# Altium PCB StrainLogger.PcbDoc (part 1 of 2)
Units mm, origin at the board's own origin, x right, y up, seen from the top; angles counter-clockwise.
Board outline 45 x 79 mm, 2 copper layers (Top Layer, Bottom Layer), stack 1.58 mm thick; 171 components, 91 nets, 490 pads, 131 vias.
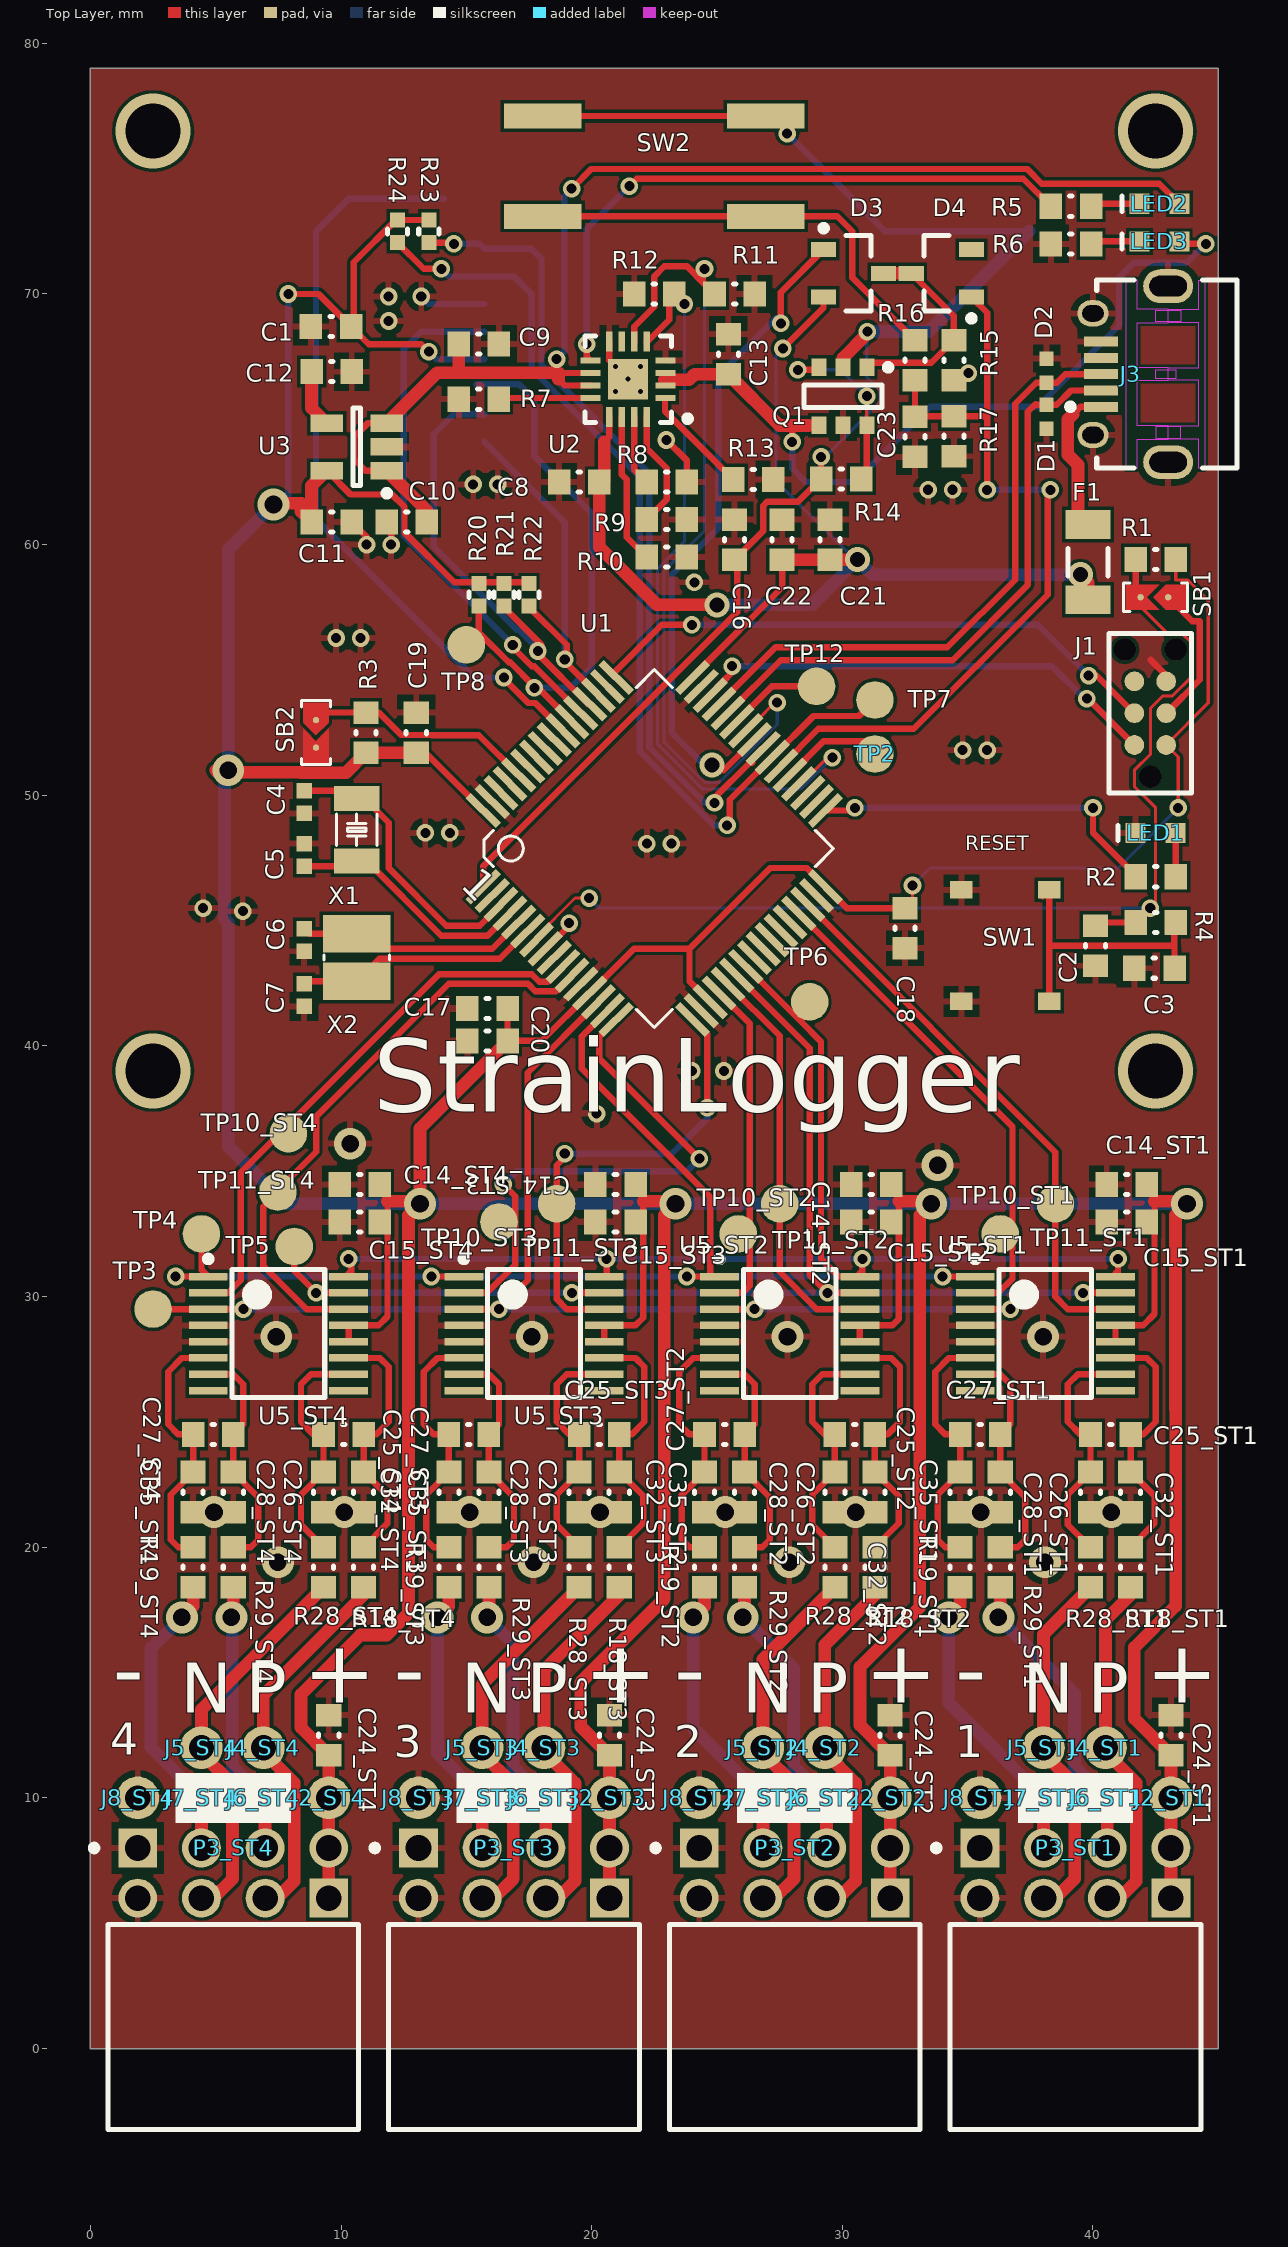
[diagram p0: Top Layer view]
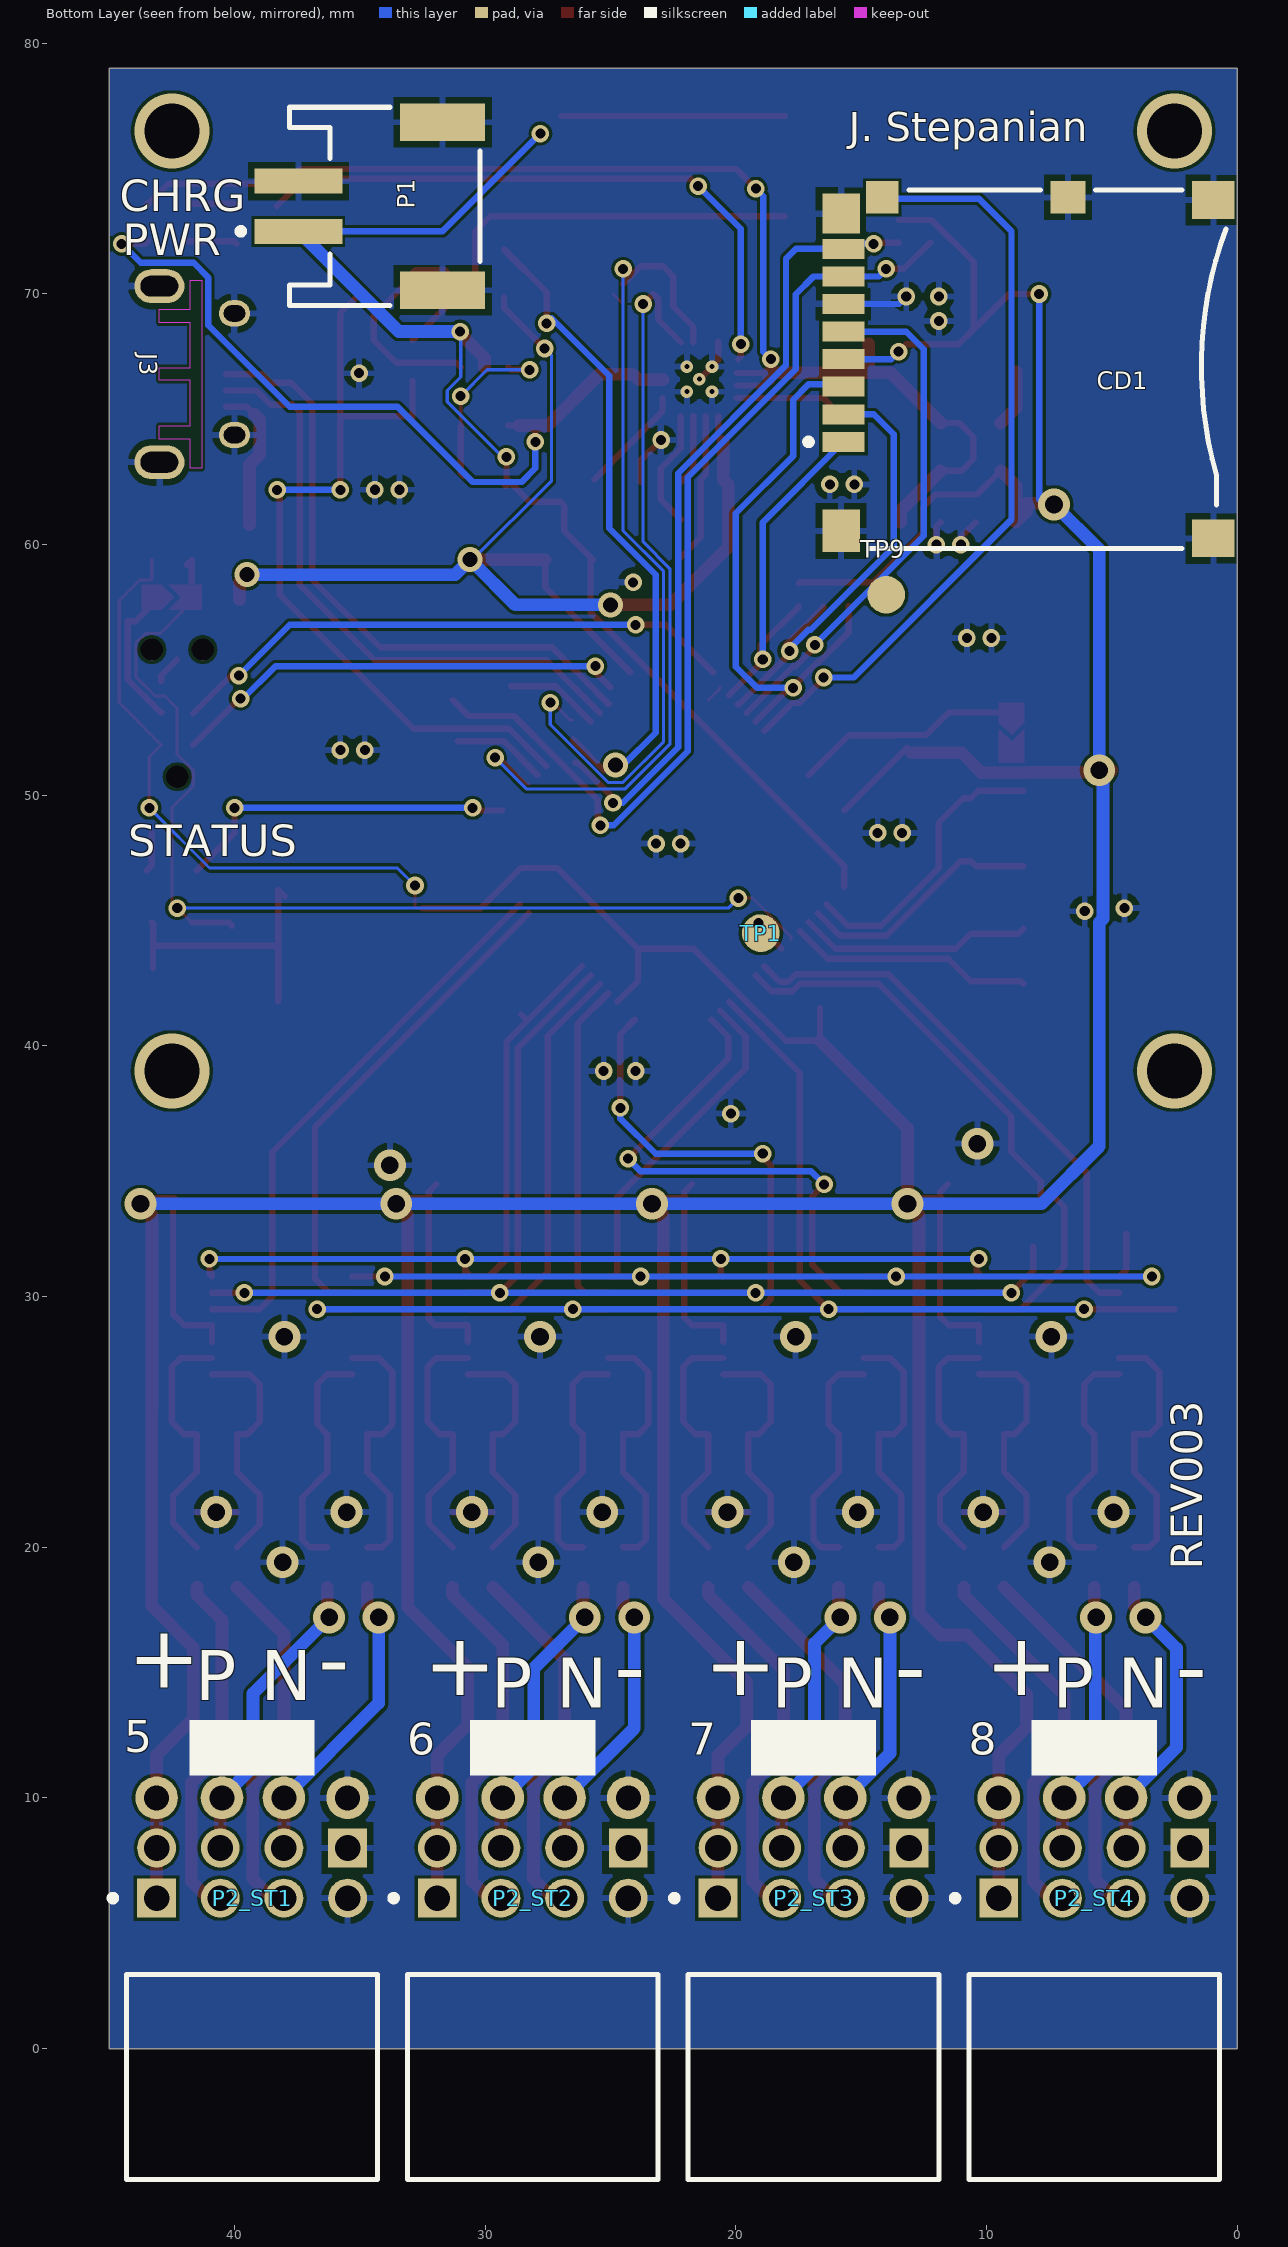
[diagram p1: Bottom Layer view, seen from below]
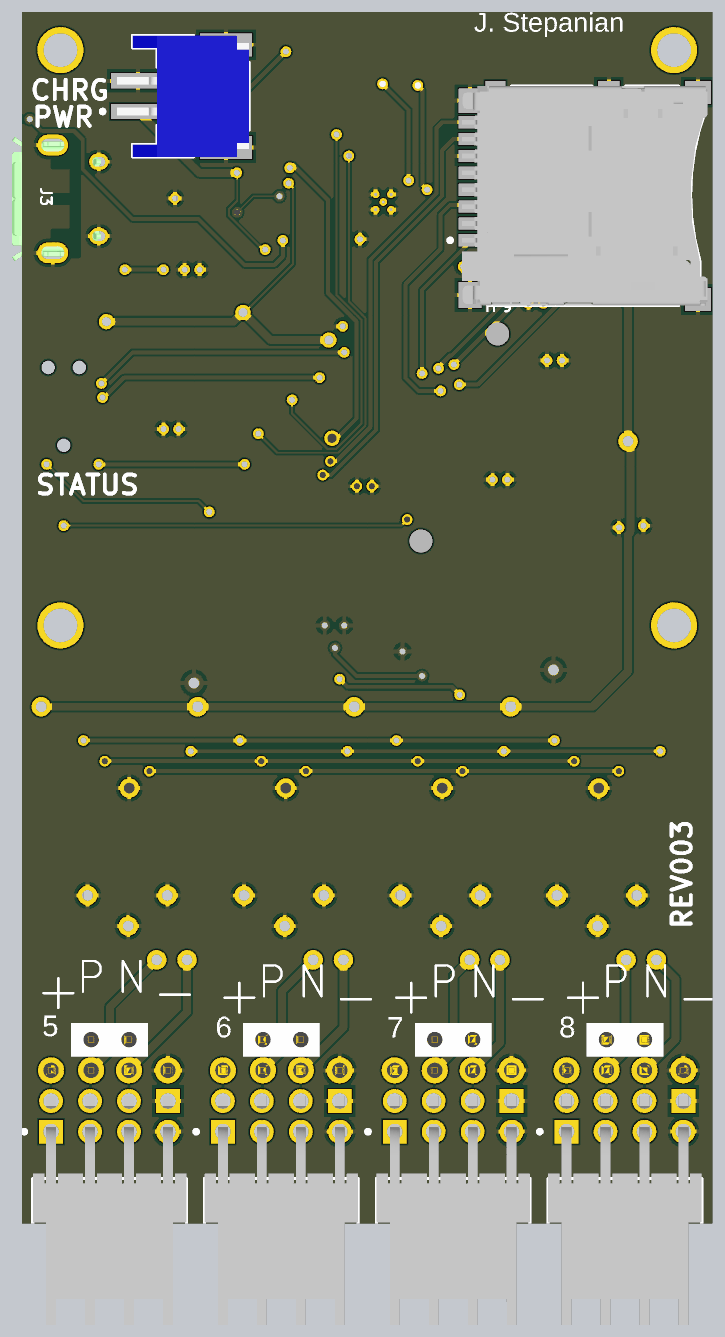
[diagram p3: 3D render of the assembled board from below, using the file's embedded part models]

## Layer stack, top to bottom
Top Solder: solder mask 0.0102, Solder Resist, Dk 3.5
Top Layer: signal copper 0.0356
Dielectric 1: dielectric 1.5089, FR-4, Dk 4.8
Bottom Layer: signal copper 0.0356
Bottom Solder: solder mask 0.0102, Solder Resist, Dk 3.5

## Board outline
0,0 45,0 45,79 0,79

## Design rules (kind name [scope] priority, off if disabled: settings)
Clearance [All] p1: gap=0.127 ignorepadtopadclearanceinfootprint=FALSE
DiffPairsRouting [All] p1: maxlimit=0.254 minlimit=0.254 mostfreqgap=0.254 toplayer_minwidth=0.254 toplayer_maxwidth=0.381 toplayer_prefwidth=0.381 bottomlayer_minwidth=0.254 bottomlayer_maxwidth=0.381 bottomlayer_prefwidth=0.381 maxuncoupledlength=12.7
HoleSize [All] p1: absolutevalues=TRUE maxlimit=6.3 minlimit=0.2 maxpercent=80.000 minpercent=20.000
MinimumAnnularRing [All] p1: minimumring=0.102
MinimumSolderMaskSliver [All] p1: minsoldermaskwidth=0.102
PlaneClearance [All] p1: clearance=0.254
PolygonConnect [All] p1: connectstyle=Relief reliefconductorwidth=0.254 reliefentries=4 polygonreliefangle="90 Angle" airgapwidth=0.254
RoomDefinition ST4 [InComponentClass('ST4')] p1: confinementstyle=ConfineIn formatcopy=TRUE lockcomponents=FALSE outline 12.3,28 2.1,28 2.1,0 12.3,0
RoomDefinition ST3 [InComponentClass('ST3')] p2: confinementstyle=ConfineIn formatcopy=TRUE lockcomponents=FALSE outline 22.5,28 12.3,28 12.3,0 22.5,0
RoomDefinition ST2 [InComponentClass('ST2')] p3: confinementstyle=ConfineIn formatcopy=TRUE lockcomponents=FALSE outline 32.7,28 22.5,28 22.5,0 32.7,0
RoomDefinition ST1 [InComponentClass('ST1')] p4: confinementstyle=ConfineIn formatcopy=TRUE lockcomponents=FALSE outline 42.9,28 32.7,28 32.7,0 42.9,0
RoutingVias [All] p1: holewidth=0.6 width=1 viastyle="Through Hole" minholewidth=0.4 minwidth=0.7 maxholewidth=0.7 maxwidth=1.27
SolderMaskExpansion [All] p1: expansion=0.076
Width [All] p1: maxlimit=0.508 minlimit=0.127 preferedwidth=0.254
26 further rules are at their usual default settings.

## Classes and differential pairs
net class X2_Nets: HFXO_1_2 HFXO_2_2
net class X1_Nets: LFXO_1_2 LFXO_2_2
net class U5_ST4_Nets: ADC_CLK_2 AIN0_ST4 AIN1_ST4 AIN2_ST4 AIN3_ST4 BR_VDD_ST1 DRDY#4 GND NetU5_ST4_8 NetU5_ST4_9 SPI1_MISO_2 SPI1_MOSI_2 SPI1_SCK_2 ST_CS#4
net class U5_ST3_Nets: ADC_CLK_2 AIN0_ST3 AIN1_ST3 AIN2_ST3 AIN3_ST3 BR_VDD_ST1 DRDY#3 GND NetU5_ST3_8 NetU5_ST3_9 SPI1_MISO_2 SPI1_MOSI_2 SPI1_SCK_2 ST_CS#3
net class U5_ST2_Nets: ADC_CLK_2 AIN0_ST2 AIN1_ST2 AIN2_ST2 AIN3_ST2 BR_VDD_ST1 DRDY#2 GND NetU5_ST2_8 NetU5_ST2_9 SPI1_MISO_2 SPI1_MOSI_2 SPI1_SCK_2 ST_CS#2
net class U5_ST1_Nets: ADC_CLK_2 AIN0_ST1 AIN1_ST1 AIN2_ST1 AIN3_ST1 BR_VDD_ST1 DRDY#1 GND NetU5_ST1_8 NetU5_ST1_9 SPI1_MISO_2 SPI1_MOSI_2 SPI1_SCK_2 ST_CS#1
net class U3_Nets: BR_VDD_ST1 GND NetC9_2 NetC12_2
net class U2_Nets: GND NetC9_2 NetR5_1 NetR7_2 NetR8_2 NetR9_2 NetR10_1 NetR13_2 NetU2_7 PWR_CTL_1 PWR_CTL_2 VBAT_SW VBUS
net class U1_Nets: #RST_2 ADC_CLK_2 BOOT0_2 BR_VDD_ST1 BUTTON DRDY#1 DRDY#2 DRDY#3 DRDY#4 DRDY_TIM_2 GND HFXO_1_2 HFXO_2_2 LED_STAT_2 LFXO_1_2 LFXO_2_2 NetU1_2 NetU1_9 NetU1_24 NetU1_25 NetU1_26 NetU1_27 NetU1_28 NetU1_34 NetU1_35 NetU1_50 NetU1_56 NetU1_57 NetU1_58 NetU1_59 NetU1_61 NetU1_62 PC0_2 PWR_CTL_1 PWR_CTL_2 SD_CLK_2 SD_CMD_2 SD_DAT0_2 SD_DAT1_2 SD_DAT2_2 SD_DAT3_2 SD_DETECT_2 SPI1_MISO_2 SPI1_MOSI_2 SPI1_SCK_2 ST_CS#1 ST_CS#2 ST_CS#3 ST_CS#4 SWCLK_2 SWDIO_2 SYNC_2 USB_1_N USB_1_P V_LATCH VBAT VBUS
net class TP12_Nets: DRDY_TIM_2
net class TP11_ST4_Nets: DRDY#4
net class TP11_ST3_Nets: DRDY#3
net class TP11_ST2_Nets: DRDY#2
net class TP11_ST1_Nets: DRDY#1
net class TP10_ST4_Nets: ST_CS#4
net class TP10_ST3_Nets: ST_CS#3
net class TP10_ST2_Nets: ST_CS#2
net class TP10_ST1_Nets: ST_CS#1
net class TP9_Nets: SD_CLK_2
net class TP8_Nets: SD_CMD_2
net class TP7_Nets: SD_DAT0_2
net class TP6_Nets: SPI1_MOSI_2
net class TP5_Nets: SPI1_MISO_2
net class TP4_Nets: SPI1_SCK_2
net class TP3_Nets: ADC_CLK_2
net class TP2_Nets: SYNC_2
net class TP1_Nets: PC0_2
net class SW2_Nets: NetR16_1 VBAT
net class SW1_Nets: #RST_FL_2 GND
net class ST_CS#[1..4]: ST_CS#1 ST_CS#2 ST_CS#3 ST_CS#4
net class SB2_Nets: BOOT0_2 GND
net class SB1_Nets: #RST_2 NetJ1_3
net class R29_ST4_Nets: AIN2_ST4 BRIDGE2_ST4_P
net class R29_ST3_Nets: AIN2_ST3 BRIDGE2_ST3_P
net class R29_ST2_Nets: AIN2_ST2 BRIDGE2_ST2_P
net class R29_ST1_Nets: AIN2_ST1 BRIDGE2_ST1_P
net class R28_ST4_Nets: AIN1_ST4 BRIDGE1_ST4_N
net class R28_ST3_Nets: AIN1_ST3 BRIDGE1_ST3_N
net class R28_ST2_Nets: AIN1_ST2 BRIDGE1_ST2_N
net class R28_ST1_Nets: AIN1_ST1 BRIDGE1_ST1_N
net class R24_Nets: BR_VDD_ST1 SD_DAT0_2
net class R23_Nets: BR_VDD_ST1 SD_DAT1_2
net class R22_Nets: BR_VDD_ST1 SD_DAT2_2
net class R21_Nets: BR_VDD_ST1 SD_DAT3_2
net class R20_Nets: BR_VDD_ST1 SD_CMD_2
net class R19_ST4_Nets: AIN3_ST4 BRIDGE2_ST4_N
net class R19_ST3_Nets: AIN3_ST3 BRIDGE2_ST3_N
net class R19_ST2_Nets: AIN3_ST2 BRIDGE2_ST2_N
net class R19_ST1_Nets: AIN3_ST1 BRIDGE2_ST1_N
net class R18_ST4_Nets: AIN0_ST4 BRIDGE1_ST4_P
net class R18_ST3_Nets: AIN0_ST3 BRIDGE1_ST3_P
net class R18_ST2_Nets: AIN0_ST2 BRIDGE1_ST2_P
net class R18_ST1_Nets: AIN0_ST1 BRIDGE1_ST1_P
net class R17_Nets: BUTTON GND
net class R16_Nets: BUTTON NetR16_1
net class R15_Nets: GND NetD3_3
net class R14_Nets: NetQ1_3 VBAT
net class R13_Nets: GND NetR13_2
net class R12_Nets: GND PWR_CTL_2
net class R11_Nets: GND PWR_CTL_1
net class R10_Nets: GND NetR10_1
net class R9_Nets: GND NetR9_2
net class R8_Nets: GND NetR8_2
net class R7_Nets: GND NetR7_2
net class R6_Nets: GND NetLED3_1
net class R5_Nets: NetLED2_1 NetR5_1
net class R4_Nets: #RST_2 #RST_FL_2
net class R3_Nets: BOOT0_2 BR_VDD_ST1
net class R2_Nets: LED_STAT_2 NetLED1_2
net class R1_Nets: #RST_2 BR_VDD_ST1
net class Q1_Nets: GND NetD3_3 NetQ1_3 VBAT VBAT_SW
net class P3_ST4_Nets: BR_VDD_ST1 BRIDGE2_ST4_N BRIDGE2_ST4_P GND
net class P3_ST3_Nets: BR_VDD_ST1 BRIDGE2_ST3_N BRIDGE2_ST3_P GND
net class P3_ST2_Nets: BR_VDD_ST1 BRIDGE2_ST2_N BRIDGE2_ST2_P GND
net class P3_ST1_Nets: BR_VDD_ST1 BRIDGE2_ST1_N BRIDGE2_ST1_P GND
net class P2_ST4_Nets: BR_VDD_ST1 BRIDGE1_ST4_N BRIDGE1_ST4_P GND
net class P2_ST3_Nets: BR_VDD_ST1 BRIDGE1_ST3_N BRIDGE1_ST3_P GND
net class P2_ST2_Nets: BR_VDD_ST1 BRIDGE1_ST2_N BRIDGE1_ST2_P GND
net class P2_ST1_Nets: BR_VDD_ST1 BRIDGE1_ST1_N BRIDGE1_ST1_P GND
net class P1_Nets: GND VBAT
net class LED3_Nets: NetLED3_1 VBAT_SW
net class LED2_Nets: NetC9_2 NetLED2_1
net class LED1_Nets: GND NetLED1_2
net class J8_ST4_Nets: GND
net class J8_ST3_Nets: GND
net class J8_ST2_Nets: GND
net class J8_ST1_Nets: GND
net class J7_ST4_Nets: BRIDGE2_ST4_N
net class J7_ST3_Nets: BRIDGE2_ST3_N
net class J7_ST2_Nets: BRIDGE2_ST2_N
net class J7_ST1_Nets: BRIDGE2_ST1_N
net class J6_ST4_Nets: BRIDGE2_ST4_P
net class J6_ST3_Nets: BRIDGE2_ST3_P
net class J6_ST2_Nets: BRIDGE2_ST2_P
net class J6_ST1_Nets: BRIDGE2_ST1_P
net class J5_ST4_Nets: BRIDGE1_ST4_N
net class J5_ST3_Nets: BRIDGE1_ST3_N
net class J5_ST2_Nets: BRIDGE1_ST2_N
net class J5_ST1_Nets: BRIDGE1_ST1_N
net class J4_ST4_Nets: BRIDGE1_ST4_P
net class J4_ST3_Nets: BRIDGE1_ST3_P
net class J4_ST2_Nets: BRIDGE1_ST2_P
net class J4_ST1_Nets: BRIDGE1_ST1_P
net class J3_Nets: GND NetF1_1 NetJ3_4 USB_1_N USB_1_P
net class J2_ST4_Nets: BR_VDD_ST1
net class J2_ST3_Nets: BR_VDD_ST1
net class J2_ST2_Nets: BR_VDD_ST1
net class J2_ST1_Nets: BR_VDD_ST1
net class J1_Nets: BR_VDD_ST1 GND NetJ1_3 NetJ1_6 SWCLK_2 SWDIO_2
net class F1_Nets: NetF1_1 VBUS
net class DRDY#[1..4]: DRDY#1 DRDY#2 DRDY#3 DRDY#4
net class D4_Nets: BUTTON NetD3_3 NetD4_2
net class D3_Nets: NetD3_3 V_LATCH VBUS
net class D2_Nets: GND USB_1_P
net class D1_Nets: GND USB_1_N
net class CD1_Nets: BR_VDD_ST1 GND SD_CLK_2 SD_CMD_2 SD_DAT0_2 SD_DAT1_2 SD_DAT2_2 SD_DAT3_2 SD_DETECT_2
net class C35_ST4_Nets: AIN3_ST4 GND
net class C35_ST3_Nets: AIN3_ST3 GND
net class C35_ST2_Nets: AIN3_ST2 GND
net class C35_ST1_Nets: AIN3_ST1 GND
net class C32_ST4_Nets: AIN0_ST4 GND
net class C32_ST3_Nets: AIN0_ST3 GND
net class C32_ST2_Nets: AIN0_ST2 GND
net class C32_ST1_Nets: AIN0_ST1 GND
net class C28_ST4_Nets: AIN2_ST4 GND
net class C28_ST3_Nets: AIN2_ST3 GND
net class C28_ST2_Nets: AIN2_ST2 GND
net class C28_ST1_Nets: AIN2_ST1 GND
net class C27_ST4_Nets: AIN2_ST4 AIN3_ST4
net class C27_ST3_Nets: AIN2_ST3 AIN3_ST3
net class C27_ST2_Nets: AIN2_ST2 AIN3_ST2
net class C27_ST1_Nets: AIN2_ST1 AIN3_ST1
net class C26_ST4_Nets: AIN1_ST4 GND
net class C26_ST3_Nets: AIN1_ST3 GND
net class C26_ST2_Nets: AIN1_ST2 GND
net class C26_ST1_Nets: AIN1_ST1 GND
net class C25_ST4_Nets: AIN0_ST4 AIN1_ST4
net class C25_ST3_Nets: AIN0_ST3 AIN1_ST3
net class C25_ST2_Nets: AIN0_ST2 AIN1_ST2
net class C25_ST1_Nets: AIN0_ST1 AIN1_ST1
net class C24_ST4_Nets: BR_VDD_ST1 GND
net class C24_ST3_Nets: BR_VDD_ST1 GND
net class C24_ST2_Nets: BR_VDD_ST1 GND
net class C24_ST1_Nets: BR_VDD_ST1 GND
net class C23_Nets: BUTTON GND
net class C22_Nets: GND VBUS
net class C21_Nets: GND VBUS
net class C20_Nets: BR_VDD_ST1 GND
net class C19_Nets: BR_VDD_ST1 GND
net class C18_Nets: BR_VDD_ST1 GND
net class C17_Nets: BR_VDD_ST1 GND
net class C16_Nets: GND VBAT
net class C15_ST4_Nets: BR_VDD_ST1 GND
net class C15_ST3_Nets: BR_VDD_ST1 GND
net class C15_ST2_Nets: BR_VDD_ST1 GND
net class C15_ST1_Nets: BR_VDD_ST1 GND
net class C14_ST4_Nets: BR_VDD_ST1 GND
net class C14_ST3_Nets: BR_VDD_ST1 GND
net class C14_ST2_Nets: BR_VDD_ST1 GND
net class C14_ST1_Nets: BR_VDD_ST1 GND
net class C13_Nets: GND VBAT_SW
net class C12_Nets: GND NetC12_2
net class C11_Nets: BR_VDD_ST1 GND
net class C10_Nets: GND NetC9_2
net class C9_Nets: GND NetC9_2
net class C8_Nets: GND VBUS
net class C7_Nets: GND HFXO_2_2
net class C6_Nets: GND HFXO_1_2
net class C5_Nets: GND LFXO_2_2
net class C4_Nets: GND LFXO_1_2
net class C3_Nets: #RST_FL_2 GND
net class C2_Nets: #RST_2 GND
net class C1_Nets: BR_VDD_ST1 GND
component class MCU: C1 C2 C3 C4 C5 C6 C7 CD1 J1 LED1 R1 R2 R3 R4 R20 R21 R22 R23 R24 SB1 SB2 SW1 TP1 TP2 TP3 TP4 TP5 TP6 TP7 TP8 TP9 TP12 U1 X1 X2
component class ST4: C14_ST4 C15_ST4 C24_ST4 C25_ST4 C26_ST4 C27_ST4 C28_ST4 C32_ST4 C35_ST4 J2_ST4 J4_ST4 J5_ST4 J6_ST4 J7_ST4 J8_ST4 P2_ST4 P3_ST4 R18_ST4 R19_ST4 R28_ST4 R29_ST4 TP10_ST4 TP11_ST4 U5_ST4
component class ST3: C14_ST3 C15_ST3 C24_ST3 C25_ST3 C26_ST3 C27_ST3 C28_ST3 C32_ST3 C35_ST3 J2_ST3 J4_ST3 J5_ST3 J6_ST3 J7_ST3 J8_ST3 P2_ST3 P3_ST3 R18_ST3 R19_ST3 R28_ST3 R29_ST3 TP10_ST3 TP11_ST3 U5_ST3
component class ST2: C14_ST2 C15_ST2 C24_ST2 C25_ST2 C26_ST2 C27_ST2 C28_ST2 C32_ST2 C35_ST2 J2_ST2 J4_ST2 J5_ST2 J6_ST2 J7_ST2 J8_ST2 P2_ST2 P3_ST2 R18_ST2 R19_ST2 R28_ST2 R29_ST2 TP10_ST2 TP11_ST2 U5_ST2
component class ST1: C14_ST1 C15_ST1 C24_ST1 C25_ST1 C26_ST1 C27_ST1 C28_ST1 C32_ST1 C35_ST1 J2_ST1 J4_ST1 J5_ST1 J6_ST1 J7_ST1 J8_ST1 P2_ST1 P3_ST1 R18_ST1 R19_ST1 R28_ST1 R29_ST1 TP10_ST1 TP11_ST1 U5_ST1
component class PWR: C8 C9 C10 C11 C12 C13 C16 C17 C18 C19 C20 C21 C22 C23 D1 D2 D3 D4 F1 J3 LED2 LED3 P1 Q1 R5 R6 R7 R8 R9 R10 R11 R12 R13 R14 R15 R16 R17 SW2 U2 U3
channel class Strain-TI: ST1 ST2 ST3 ST4 ST5 ST6 ST7
differential pair USB_1: +USB_1_P -USB_1_N

## Components (designator, comment, footprint, x,y, rotation, side; value= is the part's Value field where it differs from the comment)
C1 "100n" CAP_0603_M 9.6,68.7 r0 top
C2 "22n" CAP_0603_M 40.1,44 r90 top
C3 "10p" CAP_0603_M 42.454,43.1 r0 top
C4 "Capacitor" CAP_0402_M 8.525,49.725 r270 top value=6.8pF
C5 "Capacitor" CAP_0402_M 8.525,47.625 r90 top value=6.8pF
C6 "Capacitor" CAP_0402_M 8.525,44.225 r90 top value=8.2pF
C7 "Capacitor" CAP_0402_M 8.525,42.025 r90 top value=8.2pF
C8 "1u" CAP_0603_M 19.5,62.5 r0 top locked
C9 "4.7u" CAP_0603_M 15.5,68 r180 top
C10 "1u" CAP_0603_M 12.625,60.9 r0 top locked
C11 "4.7u" CAP_0603_M 9.625,60.9 r180 top locked
C12 "10n" CAP_0603_M 9.625,66.9 r180 top locked
C13 "4.7u" CAP_0603_M 25.45,67.6 r270 top locked
C14_ST1 "1u" CAP_0603_M 41.35,34.475 r0 top locked (schematic designator C14)
C14_ST2 "1u" CAP_0603_M 31.15,34.475 r0 top locked (schematic designator C14)
C14_ST3 "1u" CAP_0603_M 20.95,34.475 r0 top locked (schematic designator C14)
C14_ST4 "1u" CAP_0603_M 10.75,34.475 r0 top locked (schematic designator C14)
C15_ST1 "1u" CAP_0603_M 41.35,32.975 r0 top locked (schematic designator C15)
C15_ST2 "1u" CAP_0603_M 31.15,32.975 r0 top locked (schematic designator C15)
C15_ST3 "1u" CAP_0603_M 20.95,32.975 r0 top locked (schematic designator C15)
C15_ST4 "1u" CAP_0603_M 10.75,32.975 r0 top locked (schematic designator C15)
C16 "1u" CAP_0603_M 25.7,60.2 r270 top
C17 "4.7u" CAP_0603_M 15.843,41.5 r0 top
C18 "100n" CAP_0603_M 32.5,44.7 r90 top
C19 "100n" CAP_0603_M 13,52.5 r270 top
C20 "100n" CAP_0603_M 15.843,40.2 r0 top
C21 "1u" CAP_0603_M 29.5,60.2 r270 top
C22 "100n" CAP_0603_M 27.6,60.2 r270 top
C23 "220n" CAP_0603_M 32.9,64.3 r90 top
C24_ST1 "1u" CAP_0603_M 43.11,12.5 r90 top (schematic designator C24)
C24_ST2 "1u" CAP_0603_M 31.91,12.5 r90 top (schematic designator C24)
C24_ST3 "1u" CAP_0603_M 20.71,12.5 r90 top (schematic designator C24)
C24_ST4 "1u" CAP_0603_M 9.51,12.5 r90 top (schematic designator C24)
C25_ST1 "10n" CAP_0603_M 40.7,24.5 r0 top (schematic designator C25)
C25_ST2 "10n" CAP_0603_M 30.5,24.5 r0 top (schematic designator C25)
C25_ST3 "10n" CAP_0603_M 20.3,24.5 r0 top (schematic designator C25)
C25_ST4 "10n" CAP_0603_M 10.1,24.5 r0 top (schematic designator C25)
C26_ST1 "10n" CAP_0603_M 39.9,22.2 r270 top (schematic designator C26)
C26_ST2 "10n" CAP_0603_M 29.7,22.2 r270 top (schematic designator C26)
C26_ST3 "10n" CAP_0603_M 19.5,22.2 r270 top (schematic designator C26)
C26_ST4 "10n" CAP_0603_M 9.3,22.2 r270 top (schematic designator C26)
C27_ST1 "10n" CAP_0603_M 35.5,24.5 r0 top (schematic designator C27)
C27_ST2 "10n" CAP_0603_M 25.3,24.5 r0 top (schematic designator C27)
C27_ST3 "10n" CAP_0603_M 15.1,24.5 r0 top (schematic designator C27)
C27_ST4 "10n" CAP_0603_M 4.9,24.5 r0 top (schematic designator C27)
C28_ST1 "10n" CAP_0603_M 36.3,22.2 r270 top (schematic designator C28)
C28_ST2 "10n" CAP_0603_M 26.1,22.2 r270 top (schematic designator C28)
C28_ST3 "10n" CAP_0603_M 15.9,22.2 r270 top (schematic designator C28)
C28_ST4 "10n" CAP_0603_M 5.7,22.2 r270 top (schematic designator C28)
C32_ST1 "10n" CAP_0603_M 41.5,22.2 r270 top (schematic designator C32)
C32_ST2 "10n" CAP_0603_M 31.3,22.2 r270 top (schematic designator C32)
C32_ST3 "10n" CAP_0603_M 21.1,22.2 r270 top (schematic designator C32)
C32_ST4 "10n" CAP_0603_M 10.9,22.2 r270 top (schematic designator C32)
C35_ST1 "10n" CAP_0603_M 34.7,22.2 r90 top (schematic designator C35)
C35_ST2 "10n" CAP_0603_M 24.5,22.2 r90 top (schematic designator C35)
C35_ST3 "10n" CAP_0603_M 14.3,22.2 r90 top (schematic designator C35)
C35_ST4 "10n" CAP_0603_M 4.1,22.2 r90 top (schematic designator C35)
CD1 "CN-SD-8-2SW-4S_B" MOLX-502774-0891_V 8.325,67 r90 bottom locked
D1 "PGB1010402KR" LFUS-PGB1010402KR-2_V 38.15,65.105 r90 top
D2 "PGB1010402KR" LFUS-PGB1010402KR-2_V 38.15,66.945 r270 top
D3 "BAT54C" ONSC-BAT54CL_SOT-23 30.45,70.825 r0 top locked
D4 "BAT54C" ONSC-BAT54CL_SOT-23 33.95,70.825 r180 top locked
F1 "PTC 2A" PTC_1206_M 39.8,59.3 r270 top
J1 "J-Link" TC2030-MCP-NL_R2 42.285,50.735 r90 top
J2_ST1 "Pin Header" PIN_HEADER_1POS 43.11,10 r0 top (schematic designator J2)
J2_ST2 "Pin Header" PIN_HEADER_1POS 31.91,10 r0 top (schematic designator J2)
J2_ST3 "Pin Header" PIN_HEADER_1POS 20.71,10 r0 top (schematic designator J2)
J2_ST4 "Pin Header" PIN_HEADER_1POS 9.51,10 r0 top (schematic designator J2)
J3 "Micro USB" HIRO-ZX62D-B-5P8_V 41.5,66.8 r90 top locked
J4_ST1 "Pin Header" PIN_HEADER_1POS 40.5,12 r0 top (schematic designator J4)
J4_ST2 "Pin Header" PIN_HEADER_1POS 29.3,12 r0 top (schematic designator J4)
J4_ST3 "Pin Header" PIN_HEADER_1POS 18.1,12 r0 top (schematic designator J4)
J4_ST4 "Pin Header" PIN_HEADER_1POS 6.9,12 r0 top (schematic designator J4)
J5_ST1 "Pin Header" PIN_HEADER_1POS 38.03,12 r0 top (schematic designator J5)
J5_ST2 "Pin Header" PIN_HEADER_1POS 26.83,12 r0 top (schematic designator J5)
J5_ST3 "Pin Header" PIN_HEADER_1POS 15.63,12 r0 top (schematic designator J5)
J5_ST4 "Pin Header" PIN_HEADER_1POS 4.43,12 r0 top (schematic designator J5)
J6_ST1 "Pin Header" PIN_HEADER_1POS 40.5,10 r0 top (schematic designator J6)
J6_ST2 "Pin Header" PIN_HEADER_1POS 29.3,10 r0 top (schematic designator J6)
J6_ST3 "Pin Header" PIN_HEADER_1POS 18.1,10 r0 top (schematic designator J6)
J6_ST4 "Pin Header" PIN_HEADER_1POS 6.9,10 r0 top (schematic designator J6)
J7_ST1 "Pin Header" PIN_HEADER_1POS 38.03,10 r0 top (schematic designator J7)
J7_ST2 "Pin Header" PIN_HEADER_1POS 26.83,10 r0 top (schematic designator J7)
J7_ST3 "Pin Header" PIN_HEADER_1POS 15.63,10 r0 top (schematic designator J7)
J7_ST4 "Pin Header" PIN_HEADER_1POS 4.43,10 r0 top (schematic designator J7)
J8_ST1 "Pin Header" PIN_HEADER_1POS 35.49,10 r0 top (schematic designator J8)
J8_ST2 "Pin Header" PIN_HEADER_1POS 24.29,10 r0 top (schematic designator J8)
J8_ST3 "Pin Header" PIN_HEADER_1POS 13.09,10 r0 top (schematic designator J8)
J8_ST4 "Pin Header" PIN_HEADER_1POS 1.89,10 r0 top (schematic designator J8)
LED1 "BLUE" 0603_A 42.5,48.5 r0 top
LED2 "YLW" 0603_A 42.65,73.6 r0 top
LED3 "GRN" 0603_A 42.65,72.1 r0 top
P1 "S2B-PH-SM4-TB" "JST- S2B-PH-SM4-TB(LF)(SN)-2_V" 34,73.5 r90 bottom
P2_ST1 "KK100 RA" MOLEX_KK100_RA_4P 39.3,6 r180 bottom (schematic designator P2)
P2_ST2 "KK100 RA" MOLEX_KK100_RA_4P 28.1,6 r180 bottom (schematic designator P2)
P2_ST3 "KK100 RA" MOLEX_KK100_RA_4P 16.9,6 r180 bottom (schematic designator P2)
P2_ST4 "KK100 RA" MOLEX_KK100_RA_4P 5.7,6 r180 bottom (schematic designator P2)
P3_ST1 "KK100 RA" MOLEX_KK100_RA_4P 39.3,8 r0 top (schematic designator P3)
P3_ST2 "KK100 RA" MOLEX_KK100_RA_4P 28.1,8 r0 top (schematic designator P3)
P3_ST3 "KK100 RA" MOLEX_KK100_RA_4P 16.9,8 r0 top (schematic designator P3)
P3_ST4 "KK100 RA" MOLEX_KK100_RA_4P 5.7,8 r0 top (schematic designator P3)
Q1 "Si3552DV" VISHAY-TSOP6 30.025,65.915 r270 top
R1 "56K" RES_0603_M 42.5,59.4 r0 top
R2 "430R" RES_0603_M 42.5,46.75 r180 top
R3 "10k" RES_0603_M 11,52.5 r270 top
R4 "1k" RES_0603_M 42.5,44.925 r180 top
R5 "430R" RES_0603_M 39.122,73.5 r0 top
R6 "430R" RES_0603_M 39.122,72 r0 top
R7 "1.05K" RES_0603_M 15.5,65.8 r0 top
R8 "OPT" RES_0603_M 23,62.5 r180 top
R9 "620R" RES_0603_M 23,61 r180 top
R10 "4.3K" RES_0603_M 23,59.5 r0 top
R11 "100K" RES_0603_M 25.7,70 r180 top
R12 "100K" RES_0603_M 22.5,70 r180 top
R13 "10K" RES_0603_M 26.45,62.6 r180 top locked
R14 "100K" RES_0603_M 29.95,62.625 r180 top locked
R15 "100K" RES_0603_M 34.45,67.35 r90 top
R16 "18K" RES_0603_M 32.9,67.35 r270 top
R17 "100K" RES_0603_M 34.45,64.325 r90 top
R18_ST1 "100R" RES_0603_M 41.5,19.2 r90 top (schematic designator R18)
R18_ST2 "100R" RES_0603_M 31.3,19.2 r90 top (schematic designator R18)
R18_ST3 "100R" RES_0603_M 21.1,19.2 r90 top (schematic designator R18)
R18_ST4 "100R" RES_0603_M 10.9,19.2 r90 top (schematic designator R18)
R19_ST1 "100R" RES_0603_M 34.7,19.2 r90 top (schematic designator R19)
R19_ST2 "100R" RES_0603_M 24.5,19.2 r90 top (schematic designator R19)
R19_ST3 "100R" RES_0603_M 14.3,19.2 r90 top (schematic designator R19)
R19_ST4 "100R" RES_0603_M 4.1,19.2 r90 top (schematic designator R19)
R20 "10K" RES_0402 15.5,58 r90 top
R21 "10K" RES_0402 16.5,58 r90 top
R22 "10K" RES_0402 17.5,58 r90 top
R23 "10K" RES_0402 13.5,72.5 r90 top
R24 "10K" RES_0402 12.25,72.5 r90 top
R28_ST1 "100R" RES_0603_M 39.9,19.2 r90 top (schematic designator R28)
R28_ST2 "100R" RES_0603_M 29.7,19.2 r90 top (schematic designator R28)
R28_ST3 "100R" RES_0603_M 19.5,19.2 r90 top (schematic designator R28)
R28_ST4 "100R" RES_0603_M 9.3,19.2 r90 top (schematic designator R28)
R29_ST1 "100R" RES_0603_M 36.3,19.2 r90 top (schematic designator R29)
R29_ST2 "100R" RES_0603_M 26.1,19.2 r90 top (schematic designator R29)
R29_ST3 "100R" RES_0603_M 15.9,19.2 r90 top (schematic designator R29)
R29_ST4 "100R" RES_0603_M 5.7,19.2 r90 top (schematic designator R29)
SB1 "SB_ON" SOLDER-BRIDGE_R0603-0R 42.5,57.9 r180 top
SB2 "SB_ON" SOLDER-BRIDGE_R0603-0R 9,52.5 r270 top
SW1 "TL3315NF160Q" E-SWITCH_TL3315NF160Q 36.5,44 r270 top
SW2 "Tactile Switch" E-Switch_TL6120DF300QG 22.5,75.1 r270 top locked
TP1 "TP-1.5mm" TP-1.5MM 19,44.5 r180 bottom
TP2 "TP-1.5mm" TP-1.5MM 31.3,51.648 r0 top
TP3 "TP-1.5mm" TP-1.5mm 2.5,29.5 r0 top
TP4 "TP-1.5mm" TP-1.5mm 4.43,32.5 r0 top
TP5 "TP-1.5mm" TP-1.5mm 8.131,32 r0 top
TP6 "TP-1.5mm" TP-1.5mm 28.7,41.759 r0 top
TP7 "TP-1.5mm" TP-1.5mm 31.3,53.801 r0 top
TP8 "TP-1.5mm" TP-1.5mm 15,56 r0 top
TP9 "TP-1.5mm" TP-1.5mm 14,58 r180 bottom
TP10_ST1 "TP-1.5mm" TP-1.5mm 36.3,32.5 r0 top (schematic designator TP10)
TP10_ST2 "TP-1.5mm" TP-1.5mm 25.853,32.5 r0 top (schematic designator TP10)
TP10_ST3 "TP-1.5mm" TP-1.5mm 16.3,32.975 r0 top (schematic designator TP10)
TP10_ST4 "TP-1.5mm" TP-1.5mm 7.9,36.5 r0 top (schematic designator TP10)
TP11_ST1 "TP-1.5mm" TP-1.5mm 38.5,33.7 r0 top (schematic designator TP11)
TP11_ST2 "TP-1.5mm" TP-1.5mm 27.5,33.7 r0 top (schematic designator TP11)
TP11_ST3 "TP-1.5mm" TP-1.5mm 18.6,33.7 r0 top (schematic designator TP11)
TP11_ST4 "TP-1.5mm" TP-1.5mm 7.481,34.171 r0 top (schematic designator TP11)
TP12 "TP-1.5mm" TP-1.5mm 28.97,54.345 r0 top
U1 "STM32L433RCT6" ICC_LQFP64_10X10_P050 22.5,47.875 r315 top locked
U2 "TI-BQ24074RGT16" TI-BQ24074RGT16 21.45,66.6 r180 top locked
U3 "TPS73633DBVTG4" TI-DBV5_M 10.625,63.9 r180 top locked
U5_ST1 "ADS1220IPWR" TI_PW_SOP127P600-8N#1 35.3,30.8 r0 top (schematic designator U5)
U5_ST2 "ADS1220IPWR" TI_PW_SOP127P600-8N#2 27.9,28.525 r0 top (schematic designator U5)
U5_ST3 "ADS1220IPWR" TI_PW_SOP127P600-8N#2 17.7,28.525 r0 top (schematic designator U5)
U5_ST4 "ADS1220IPWR" TI_PW_SOP127P600-8N#2 7.5,28.525 r0 top (schematic designator U5)
X1 "XTAL_32K_NX3215SA" CRY_NX3215SA_2P 10.625,48.625 r270 top value=NX3215SA-32.768K
X2 "XTAL_8M_NX3225GD" CRY_NX3225GD_2P 10.625,43.525 r270 top value=NX3225GD-8.00M

## Footprints (in the part's own frame and the unit in brackets; to place one, negate y for a bottom-side part, rotate by r counter-clockwise, add the part's x,y. Pads: shape width x height; smd on the part's side, far side on the other; paste and mask are expansions set on the pad)
0603_A [mm] "Chip LED, 2-Leads, Body 1.6x0.8mm, IPC Medium Density"
  rect 0.8x0.8 smd: 1(-0.8,0) 2(0.8,0)
  silkscreen extent -1.5,-0.3 -1.5,0.3, body extent -0.8,-0.4 0.8,0.4, height 0.7
CAP_0402_M [mm] "Chip Capacitor, Body 1.0x0.5mm, Height 0.6mm, IPC Medium Density"
  rect 0.62x0.62 smd: 1(-0.45,0) 2(0.45,0)
  body extent -0.55,-0.3 0.55,0.3, height 0.6
CAP_0603_M [mm]
  rect 0.9x1 smd: 1(-0.8,0) 2(0.8,0)
  silkscreen extent -0.05,-0.4 0.05,0.4, body extent -0.87,-0.48 0.88,0.47, height 1
CRY_NX3215SA_2P [mm]
  rect 1x1.8 smd mask+0.05: 1(-1.25,0) 2(1.25,0)
  silkscreen extent -0.63,-0.8 0.63,0.8, body extent -1.65,-0.8 1.65,0.8, height 0.9
CRY_NX3225GD_2P [mm]
  rect 1.5x2.7 smd mask+0.05: 1(-0.95,0) 2(0.95,0)
  silkscreen extent -0.1,-1.3 0.1,1.3, body extent -1.65,-1.3 1.65,1.3, height 1
E-SWITCH_TL3315NF160Q [mm] "Tactile Switch, Body=5.15x4.60mm"
  rect 0.7x0.9 smd: 1(-2.225,1.75) 2(2.225,1.75) 3(-2.225,-1.75) 4(2.225,-1.75)
  body extent -2.37,-2.25 2.38,2.25, height 0.6
E-Switch_TL6120DF300QG [mm] "SWITCH TACTILE SPST-NO 0.05A 50V, Body=7.4x7.4mm"
  rect 1x3.1 smd: 1(-2,-4.45) 2(-2,4.45) 3(2,-4.45) 4(2,4.45)
  body extent -3.7,-5.05 3.7,4.95, height 10.1
HIRO-ZX62D-B-5P8_V [mm] "Micro-USB Connector, 9-Leads, Body 7.5x5.6mm, Pitch 0.65mm"
  rect 0.4x1.35 smd: 1(-1.3,1.175) 2(-0.65,1.175) 3(0,1.175) 4(0.65,1.175) 5(1.3,1.175)
  oval 1.05x1.25 hole 0.65 slot 0.85 at 90 deg: 6(-2.425,1.5) 7(2.425,1.5)
  oval 1.35x2 hole 0.825 slot 1.5 at 90 deg: 8(-3.512,-1.5) 9(3.512,-1.5)
  Top Layer keep-out region: -3.75,-2.725 -2.6,-2.725 -2.6,-1.5 -2.05,-1.5 -2.05,-2.725 -0.25,-2.725 -0.25,-1.5 0.25,-1.5 0.25,-2.725 2.05,-2.725 2.05,-1.5 2.6,-1.5 2.6,-2.725 3.75,-2.725 3.75,-2.95 -3.75,-2.95
  Top Layer keep-out region: -0.18,-1.8 -0.18,-1 0.18,-1 0.18,-1.8
  Top Layer keep-out region: -2.55,-2 -2.1,-2 -2.1,-1 -2.55,-1
  Top Layer keep-out region: 2.55,-2 2.1,-2 2.1,-1 2.55,-1
  Keep-Out Layer region: -2.6,-1.5 -2.05,-1.5 -2.05,-0.275 -0.25,-0.275 -0.25,-1.5 0.25,-1.5 0.25,-0.275 2.05,-0.275 2.05,-1.5 2.6,-1.5 2.6,-0.275 3.75,-0.275 3.75,0.2 -3.75,0.2 -3.75,-0.275 -2.6,-0.275
  silkscreen extent -3.75,-4.25 3.75,2.52, body extent -4.05,-4.15 4.05,1.65, height 2.75
ICC_LQFP64_10X10_P050 [mm]
  rect 0.3x1.7 smd mask+0.05: 1(-3.75,-5.9) 2(-3.25,-5.9) 3(-2.75,-5.9) 4(-2.25,-5.9) 5(-1.75,-5.9) 6(-1.25,-5.9) 7(-0.75,-5.9) 8(-0.25,-5.9) 9(0.25,-5.9) 10(0.75,-5.9) 11(1.25,-5.9) 12(1.75,-5.9) 13(2.25,-5.9) 14(2.75,-5.9) 15(3.25,-5.9) 16(3.75,-5.9) 33(3.75,5.9) 34(3.25,5.9) 35(2.75,5.9) 36(2.25,5.9) 37(1.75,5.9) 38(1.25,5.9) 39(0.75,5.9) 40(0.25,5.9) 41(-0.25,5.9) 42(-0.75,5.9) 43(-1.25,5.9) 44(-1.75,5.9) 45(-2.25,5.9) 46(-2.75,5.9) 47(-3.25,5.9) 48(-3.75,5.9)
  rect 1.7x0.3 smd mask+0.05: 17(5.9,-3.75) 18(5.9,-3.25) 19(5.9,-2.75) 20(5.9,-2.25) 21(5.9,-1.75) 22(5.9,-1.25) 23(5.9,-0.75) 24(5.9,-0.25) 25(5.9,0.25) 26(5.9,0.75) 27(5.9,1.25) 28(5.9,1.75) 29(5.9,2.25) 30(5.9,2.75) 31(5.9,3.25) 32(5.9,3.75) 49(-5.9,3.75) 50(-5.9,3.25) 51(-5.9,2.75) 52(-5.9,2.25) 53(-5.9,1.75) 54(-5.9,1.25) 55(-5.9,0.75) 56(-5.9,0.25) 57(-5.9,-0.25) 58(-5.9,-0.75) 59(-5.9,-1.25) 60(-5.9,-1.75) 61(-5.9,-2.25) 62(-5.9,-2.75) 63(-5.9,-3.25) 64(-5.9,-3.75)
  silkscreen extent -5.05,-5.05 5.05,5.05, body extent -6,-6 6,6, height 1.56
"JST- S2B-PH-SM4-TB(LF)(SN)-2_V" [mm] "SMD, 2-Leads, Body 7.9x7.6mm, Pitch 2mm"
  rect 1x3.5 smd: 1(-1,3.45) 2(1,3.45)
  rect 1.5x3.4 smd: MP1(-3.35,-2.3) MP2(3.35,-2.3)
  silkscreen extent -3.95,-3.8 3.95,5.88, body extent -3.95,-3.8 3.95,4.8, height 5.6
LFUS-PGB1010402KR-2_V [mm] "SMD, 2-Leads, Body 1.04x0.56mm"
  rect 0.58x0.56 smd: 1(-0.48,0) 2(0.48,0)
  body extent -0.52,-0.28 0.52,0.28, height 0.32
MOLEX_KK100_RA_4P [mm] "CONN, 4-Leads, Body 10.01x8.18mm, Pitch 2.54mm"
  rect 1.55x1.55 hole 1.02: 1(-3.81,0)
  round 1.55 hole 1.02: 2(-1.27,0) 3(1.27,0) 4(3.81,0)
  silkscreen extent -5.68,-11.23 5,0.12, body extent -5,-12.61 5,0.32, height 6.43
MOLX-502774-0891_V [mm] "SMD, 14-Leads, Body 15x14.3mm, Pitch 1.1mm"
  rect 0.8x1.68 smd: 1(-2.9,7.385) 2(-1.8,7.385) 3(-0.7,7.385) 4(0.4,7.385) 5(1.5,7.385) 6(2.6,7.385) 7(3.7,7.385) 8(4.8,7.385)
  rect 1.29x1.3 smd: 9(6.855,5.825)
  rect 1.29x1.4 smd: 10(6.855,-1.575)
  rect 1.5x1.7 smd: 11(6.75,-7.375) 12(-6.75,-7.375)
  rect 1.7x1.5 smd: 13(-6.45,7.475)
  rect 1.6x1.5 smd: 14(6.21,7.475)
  silkscreen extent -7.15,-7.88 7.15,8.9, body extent -7.15,-8 7.15,8, height 1.78
ONSC-BAT54CL_SOT-23 [mm] "SOT23, 3-Leads, Body 2.90x2.45mm, Pitch 0.95mm, IPC Medium Density"
  rect 1x0.6 smd: 1(-1.2,0.95) 2(-1.2,-0.95) 3(1.2,0)
  silkscreen extent -1.32,-1.5 0.7,1.92, body extent -1.3,-1.5 1.3,1.5, height 1.1
PIN_HEADER_1POS [mm]
  round 1.7 hole 1: 1(0,0)
  body extent -1.27,-1.27 1.27,1.27, height 5.58
PTC_1206_M [mm]
  rect 1.15x1.8 smd: 1(-1.5,0) 2(1.5,0)
  silkscreen extent -0.55,-0.8 0.55,0.8, body extent -1.7,-0.9 1.7,0.9, height 1.6
RES_0402 [mm] "Chip Resistor, 2-Leads, Body 1.00x0.50mm, IPC Medium Density"
  rect 0.6x0.6 smd: 1(-0.45,0) 2(0.45,0)
  silkscreen extent -0.1,-0.4 0.1,0.4, body extent -0.55,-0.3 0.55,0.3, height 0.4
RES_0603_M [mm]
  rect 0.9x1 smd: 1(-0.8,0) 2(0.8,0)
  silkscreen extent -0.05,-0.4 0.05,0.4, body extent -0.85,-0.47 0.85,0.47, height 0.6
SOLDER-BRIDGE_R0603-0R [mil]
  round 10 smd: 1(-19.68,0) 2(23.62,0)
  Top Layer region: -5.91,19.68 13.78,0 -5.91,-19.68 47.24,-19.68 47.24,19.68 -5.91,19.68
  Top Layer region: -47.24,-19.68 -47.24,19.68 -15.75,19.68 3.94,0 -15.75,-19.68 -47.24,-19.68
  silkscreen extent -50,-23 50,23, body extent -36,-20 36,20, height 22
TC2030-MCP-NL_R2 [mil]
  round 31 smd: 1(50,-25) 2(50,25) 3(100,-25) 4(100,25) 5(150,-25) 6(150,25)
  round 34 hole 35 unplated: ""(0,0) ""(200,-40) ""(200,40)
  silkscreen extent -25,-65 225,65
TI-BQ24074RGT16 [mm] "QFN, 16-Leads, Body 3x3mm, Pitch 0.5mm, Thermal Pad 1.7x1.7mm, TI Recommended"
  rect 0.8x0.25 smd paste-0.025 mask+0.07: 1(-1.5,0.75) 2(-1.5,0.25) 3(-1.5,-0.25) 4(-1.5,-0.75) 9(1.5,-0.75) 10(1.5,-0.25) 11(1.5,0.25) 12(1.5,0.75)
  rect 0.25x0.8 smd paste-0.025 mask+0.07: 5(-0.75,-1.5) 6(-0.25,-1.5) 7(0.25,-1.5) 8(0.75,-1.5) 13(0.75,1.5) 14(0.25,1.5) 15(-0.25,1.5) 16(-0.75,1.5)
  rect 1.6x1.6 smd paste-0.85 mask+0.07: 17(0,0)
  silkscreen extent -2.5,-1.73 1.73,1.73, body extent -1.57,-1.57 1.58,1.58, height 1
TI-DBV5_M [mm] "SOT23, 5-Leads, Body 2.9x1.6mm, Pitch 0.95mm, IPC Low Density"
  rect 1.3x0.7 smd: 1(-1.2,0.95) 2(-1.2,0) 3(-1.2,-0.95) 4(1.2,-0.95) 5(1.2,0.95)
  silkscreen extent -1.33,-1.55 0.15,1.97, body extent -0.87,-1.52 0.87,1.53, height 1.45
TI_PW_SOP127P600-8N#1 [mm]
  rect 1.55x0.3 smd: 1(0,0) 2(0,-0.65) 3(0,-1.3) 4(0,-1.95) 5(0,-2.6) 6(0,-3.25) 7(0,-3.9) 8(0,-4.55) 9(5.6,-4.55) 10(5.6,-3.9) 11(5.6,-3.25) 12(5.6,-2.6) 13(5.6,-1.95) 14(5.6,-1.3) 15(5.6,-0.65) 16(5.6,0)
  silkscreen extent -0.12,-4.82 4.65,0.82, body extent -0.4,-4.82 6,0.28, height 1.2
TI_PW_SOP127P600-8N#2 [mm]
  rect 1.55x0.3 smd: 1(-2.8,2.275) 2(-2.8,1.625) 3(-2.8,0.975) 4(-2.8,0.325) 5(-2.8,-0.325) 6(-2.8,-0.975) 7(-2.8,-1.625) 8(-2.8,-2.275) 9(2.8,-2.275) 10(2.8,-1.625) 11(2.8,-0.975) 12(2.8,-0.325) 13(2.8,0.325) 14(2.8,0.975) 15(2.8,1.625) 16(2.8,2.275)
  silkscreen extent -2.92,-2.55 1.85,3.1, body extent -3.2,-2.55 3.2,2.55, height 1.2
TP-1.5MM [mm] "Test Pad 1.5mm diameter"
  round 1.5 smd: 1(0,0)
TP-1.5mm [mm] "Test Pad 1.5mm diameter"
  round 1.5 smd: 1(0,0)
VISHAY-TSOP6 [mm] "6 lead TSOP, Body=3.05x2.85mm"
  rect 0.7x0.598 smd: 1(-1.16,0.95) 2(-1.16,0) 3(-1.16,-0.95) 4(1.16,-0.95) 5(1.16,0) 6(1.16,0.95)
  silkscreen extent -1.28,-1.55 0.45,1.92, body extent -1.42,-1.55 1.42,1.55, height 1.1